# Altium PCB RcMPPT-SCC.PcbDoc
Units mm, origin at the board's own origin, x right, y up, seen from the top; angles counter-clockwise.
Board outline 99.06 x 71.12 mm, 4 copper layers (Top Layer, Int1 (GND), Int2 (PWR), Bottom Layer), stack 1.369 mm thick; 11 components, 8 nets, 127 pads, 75 vias.
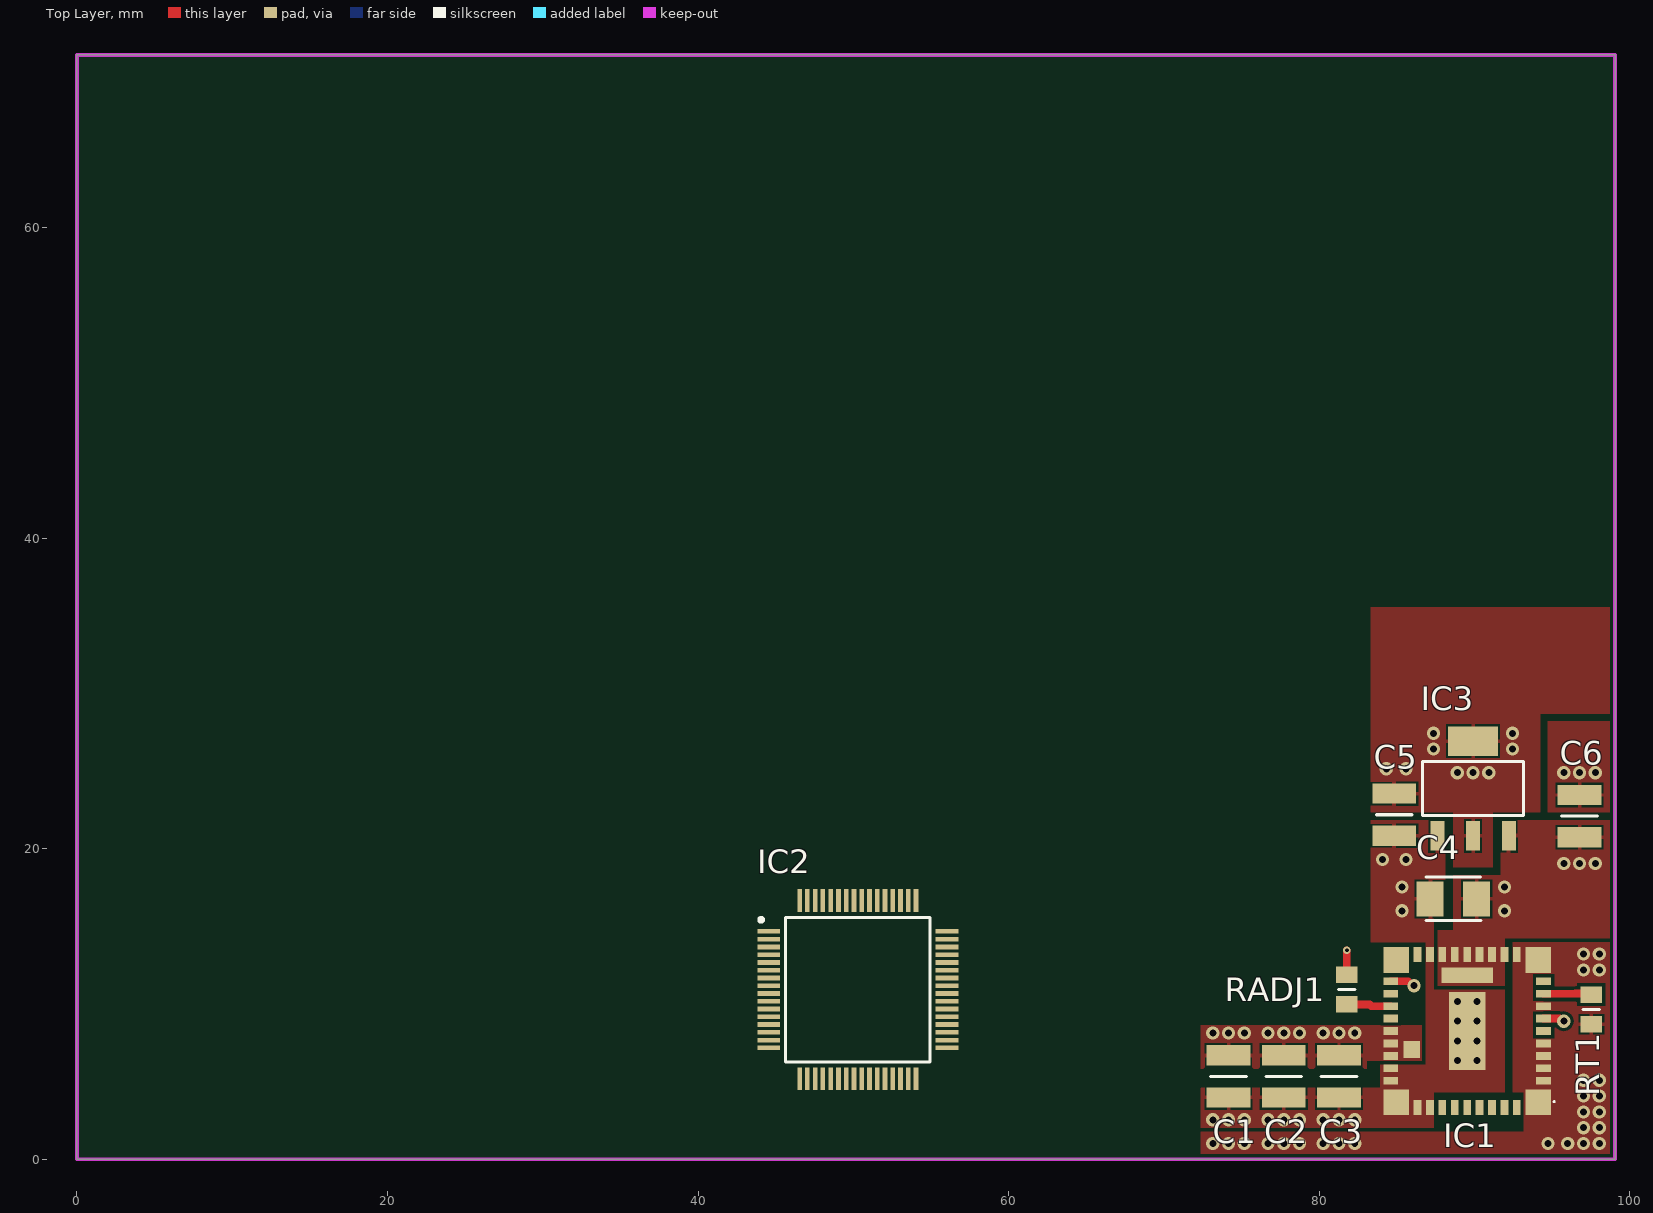
[diagram p0: Top Layer view]
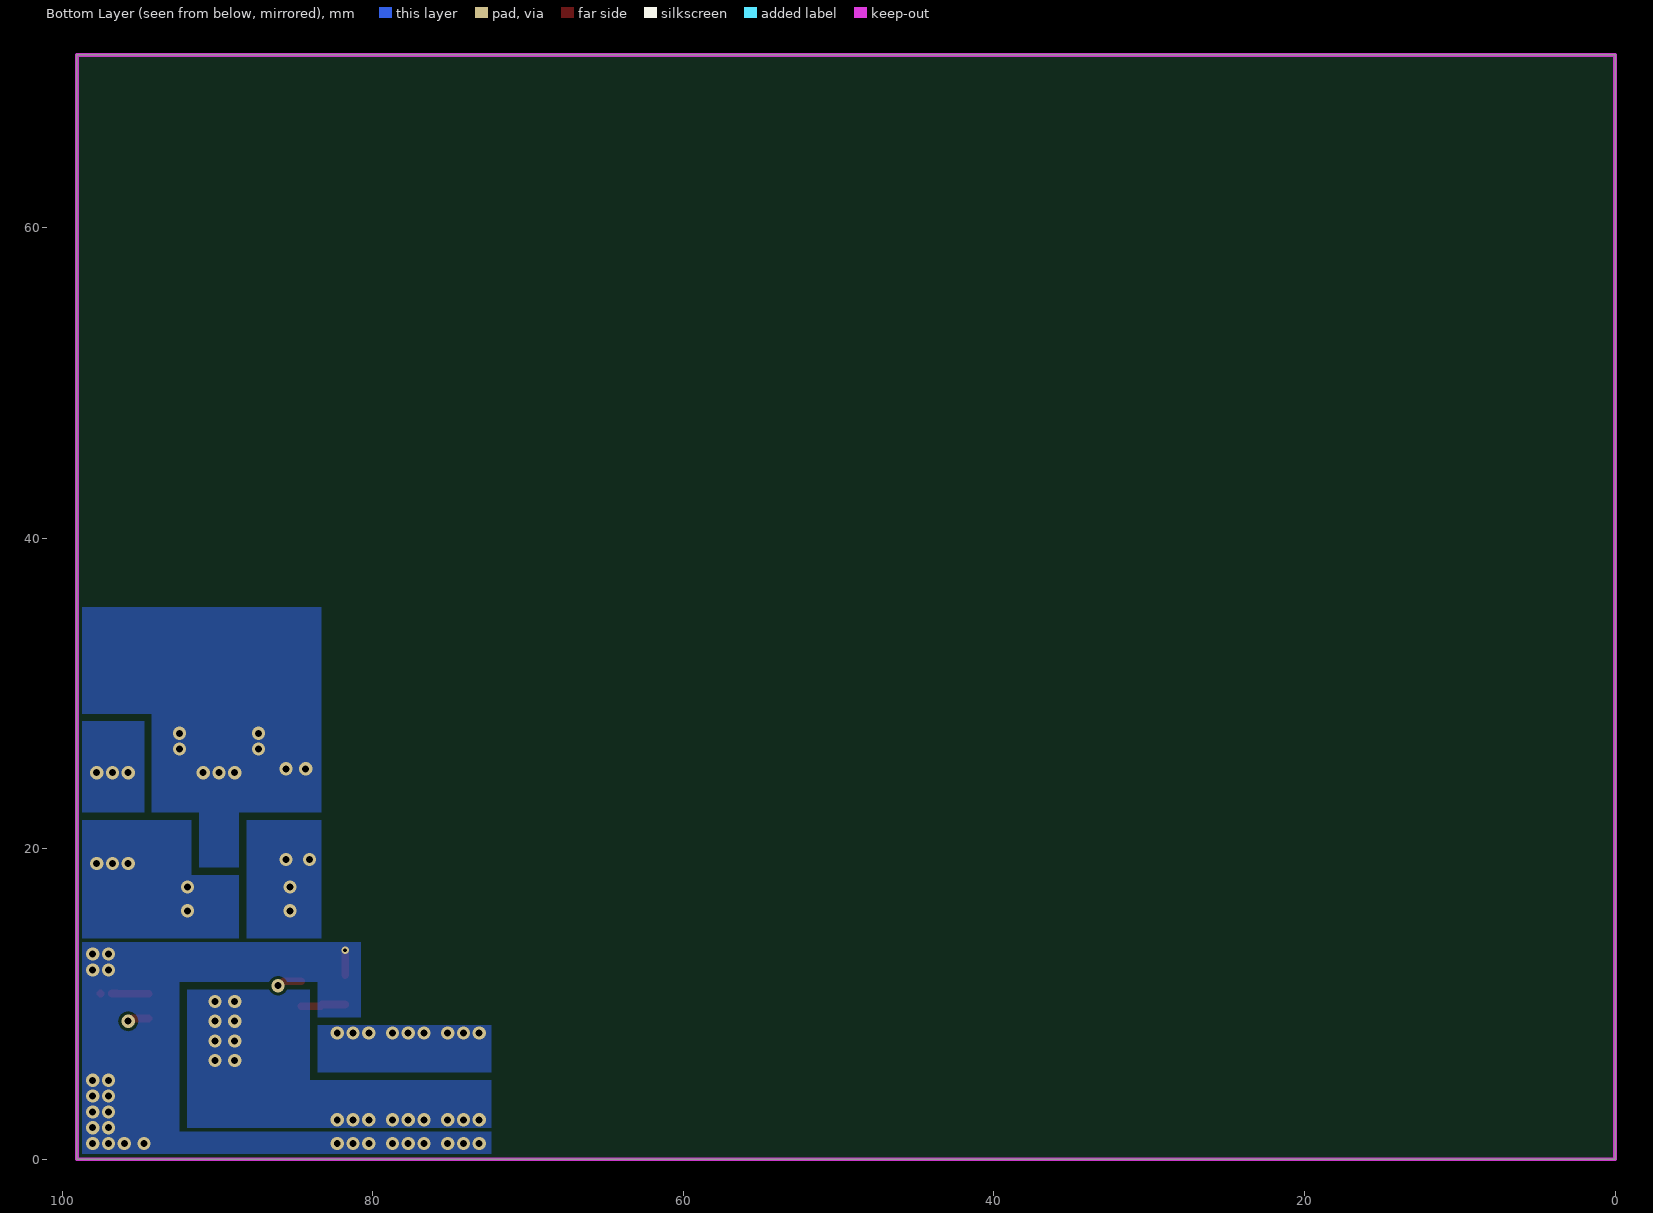
[diagram p1: Bottom Layer view, seen from below]
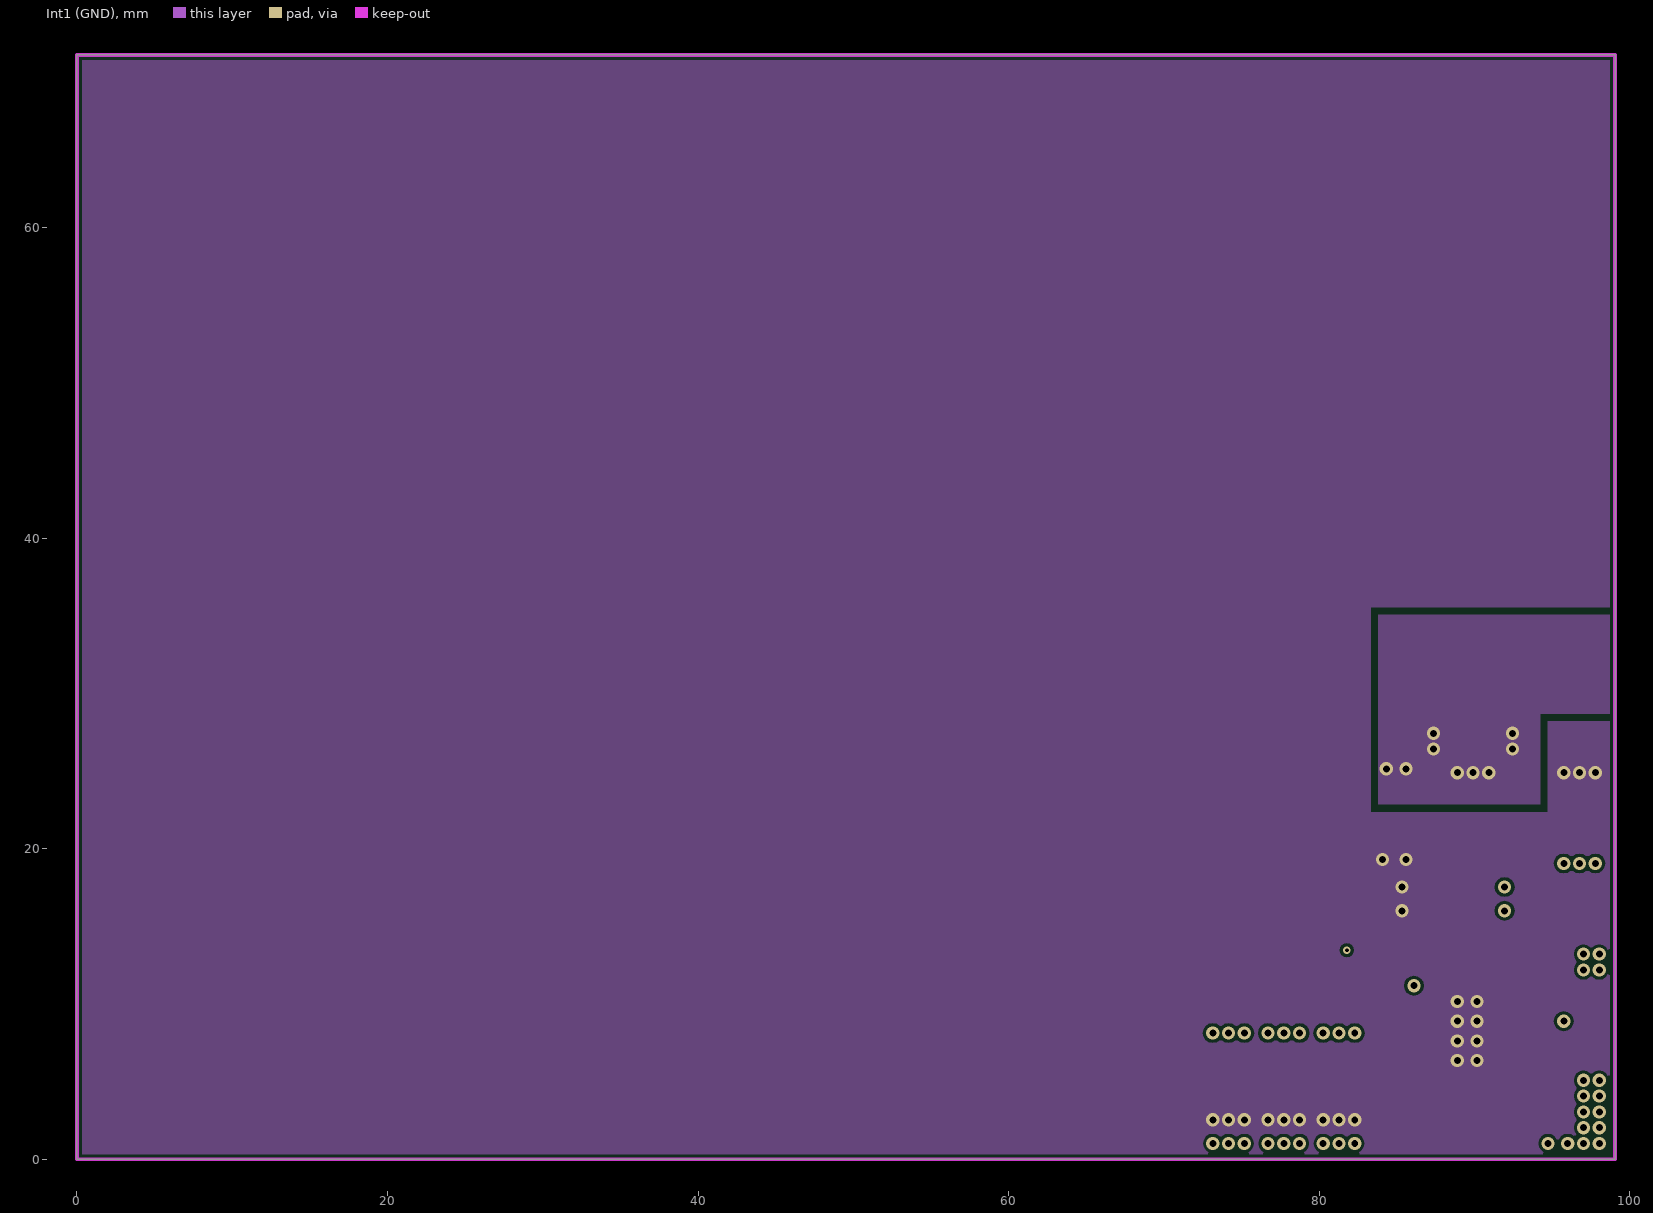
[diagram p2: Int1 (GND)]
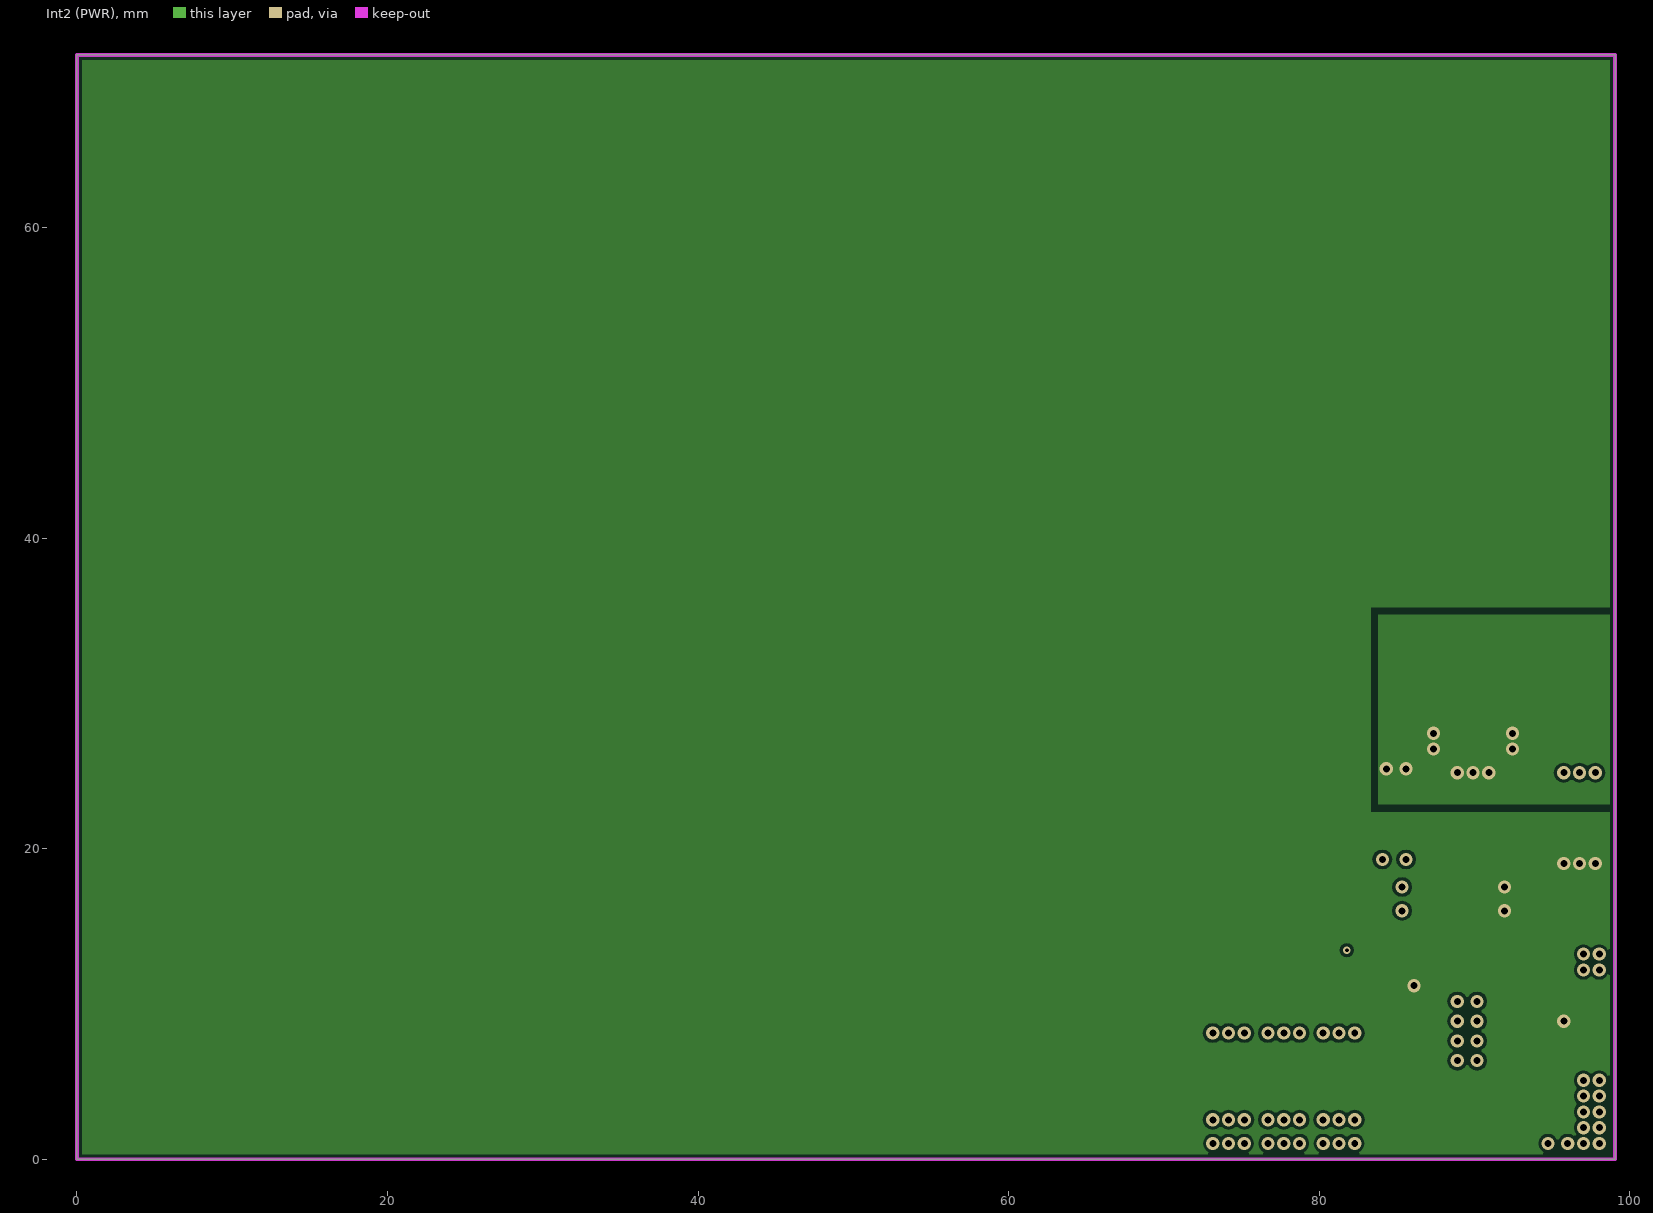
[diagram p3: Int2 (PWR)]
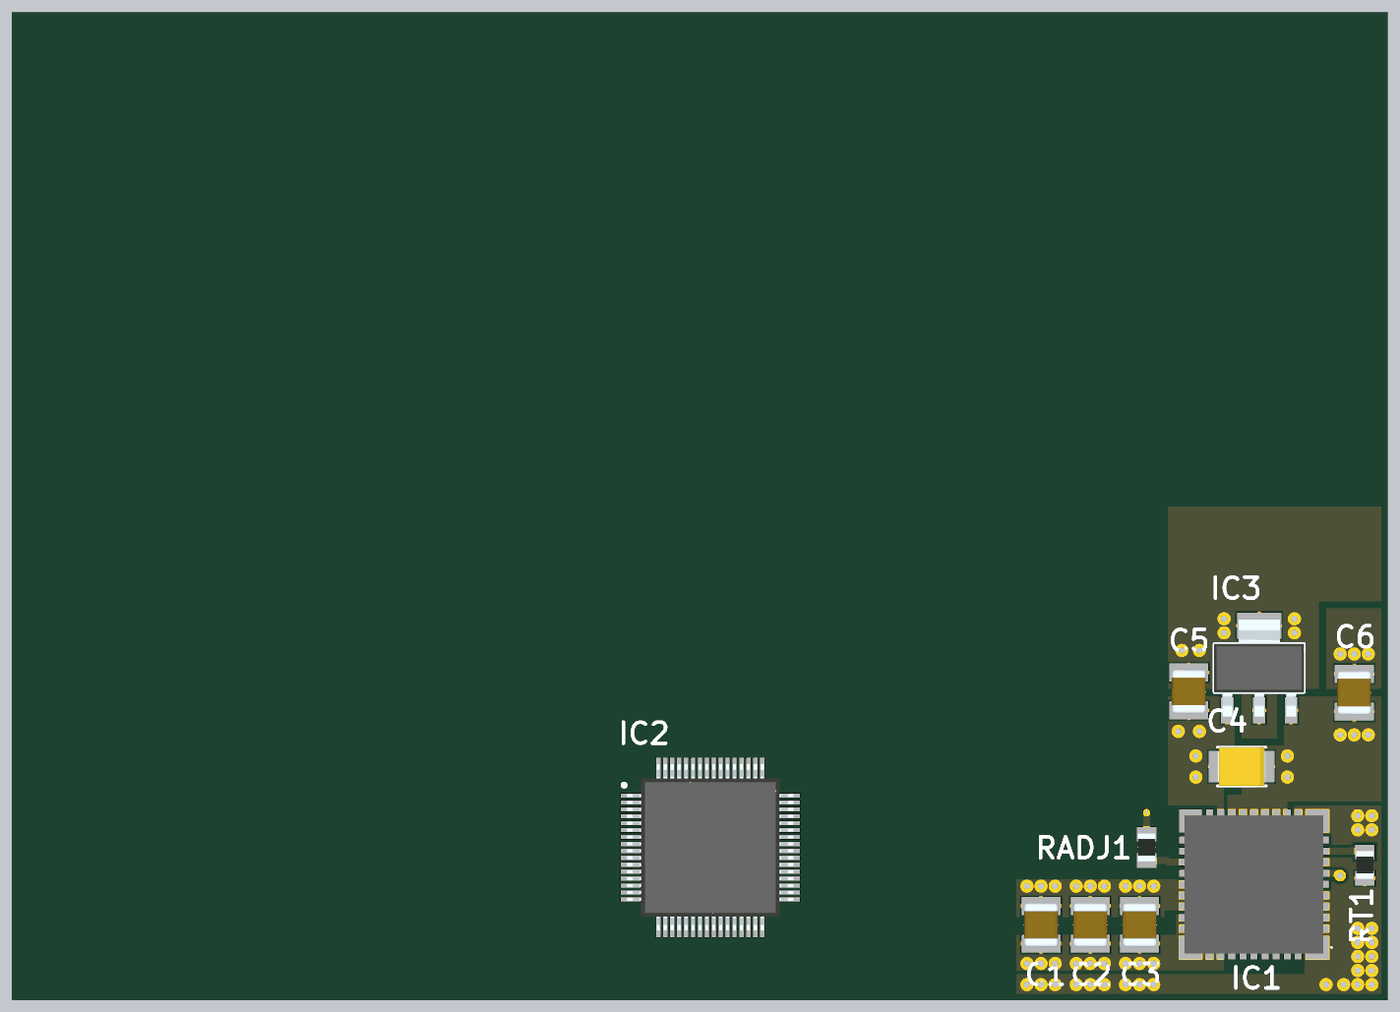
[diagram p4: 3D render of the assembled board from above, using the file's embedded part models]

## Layer stack, top to bottom
Top Solder: solder mask 0.0254, SM-001, Dk 4
Top Layer: signal copper 0.035
Dielectric 1: prepreg 0.1295, PP-017, Dk 4.3
Dielectric 2: prepreg 0.1295, PP-017, Dk 4.3
Int1 (GND): signal copper 0.035
Dielectric 3: core 0.7112, Core-039, Dk 4.8
Int2 (PWR): signal copper 0.035
Dielectric 4: prepreg 0.1295, PP-017, Dk 4.3
Dielectric 5: prepreg 0.1295, PP-017, Dk 4.3
Bottom Layer: signal copper 0.035
Bottom Solder: solder mask 0.0254, SM-001, Dk 4

## Board outline
0,0 99.06,0 99.06,71.12 0,71.12

## Design rules (kind name [scope] priority, off if disabled: settings)
BoardOutlineClearance [All] p1: gap=0.2 ignorepadtopadclearanceinfootprint=FALSE except(0.4: Arc-SplitBarrior Arc-SplitContinuation Track-SplitBarrior Track-SplitContinuation SMDPad-SplitBarrior SMDPad-SplitContinuation THPad-SplitBarrior THPad-SplitContinuation Via-SplitBarrior Via-SplitContinuation Fill-SplitBarrior Fill-SplitContinuation Poly-SplitBarrior Poly-SplitContinuation Region-SplitBarrior Region-SplitContinuation Text-SplitBarrior Text-SplitContinuation)
Clearance "Clearance Bottom Layer" [OnLayer('Bottom Layer')] p1: gap=0.203 ignorepadtopadclearanceinfootprint=TRUE except(0.254: Arc-Text Track-Text SMDPad-Text THPad-Text Via-Text Fill-Text Poly-Text Region-Text Text-Text)
Clearance "Clearance Top Layer" [OnLayer('Top Layer')] p2: gap=0.203 ignorepadtopadclearanceinfootprint=TRUE except(0.254: Arc-Text Track-Text SMDPad-Text THPad-Text Via-Text Fill-Text Poly-Text Region-Text Text-Text)
Clearance [All] p3: gap=0.2 ignorepadtopadclearanceinfootprint=FALSE except(0.089: Arc-Arc Arc-Track Arc-SMDPad Track-Track Track-SMDPad SMDPad-SMDPad; 0.127: Arc-Via Track-Via SMDPad-Via THPad-Via Via-Via; 0.254: Arc-Text Track-Text SMDPad-Text THPad-Text Via-Text Fill-Text Poly-Text Region-Text Text-Text)
HoleSize [All] p1: absolutevalues=TRUE maxlimit=6.3 minlimit=0.2 maxpercent=80.000 minpercent=20.000
MinimumAnnularRing [All] p1: minimumring=0.076
MinimumSolderMaskSliver [All] p1: minsoldermaskwidth=0.1
PlaneConnect [All] p1: pad.planeconnectstyle=Relief pad.reliefexpansion=0.508 pad.reliefentries=4 pad.reliefconductorwidth=0.254 pad.reliefairgap=0.15 via.planeconnectstyle=Direct via.reliefexpansion=0.508 via.reliefentries=4 via.reliefconductorwidth=0.254 via.reliefairgap=0.254
PolygonConnect PolygonConnect_1 [All] p1: thpad.connectstyle=Relief thpad.reliefconductorwidth=0.254 thpad.reliefentries=4 thpad.polygonreliefangle="90 Angle" thpad.airgapwidth=0.254 smdpad.connectstyle=Relief smdpad.reliefconductorwidth=0.254 smdpad.reliefentries=4 smdpad.polygonreliefangle="90 Angle" smdpad.airgapwidth=0.125 via.connectstyle=Direct via.reliefconductorwidth=0.508 via.reliefentries=4 via.polygonreliefangle="90 Angle" via.airgapwidth=0.254
RoutingCorners [All] p1: cornerstyle=Round minsetback=2.54 maxsetback=2.54
RoutingVias [All] p1: holewidth=0.5 width=1 viastyle="Through Hole" minholewidth=0.2 minwidth=0.45 maxholewidth=1 maxwidth=2
SilkToSilkClearance [All] p1: silktosilkclearance=0.1
SilkToSolderMaskClearance [IsPad] p1: minsilkscreentomaskgap=0.1 clearancetoexposedcopper=TRUE
SolderMaskExpansion [All] p1: expansion=0.05 istentingtop=FALSE
Width [All] p1: maxlimit=2.54 minlimit=0.089 preferedwidth=0.381
24 further rules are at their usual default settings.

## Classes and differential pairs
component class RcMPPT-MCU: IC2
component class RcMPPT-Power_Module: C1 C2 C3 C4 C5 C6 IC1 IC3 RADJ1 RT1

## Components (designator, comment, footprint, x,y, rotation, side; value= is the part's Value field where it differs from the comment)
C1 "10uF" CAPC3225X280N 74.168,5.334 r270 top
C2 "10uF" CAPC3225X280N 77.724,5.334 r270 top
C3 "10uF" CAPC3225X280N 81.28,5.334 r270 top
C4 "100uF" CAPPM3528X200N 88.646,16.764 r180 top
C5 "10uF" CAPC3225X280N 84.836,22.188 r270 top
C6 "10uF" CAPC3225X280N 96.774,22.098 r90 top
IC1 "LMZ36002RVQT" LMZ36002RVQR 89.535,8.255 r90 top
IC2 "STM32F334R8" QFP50P1200X1200X160-64N 50.292,10.922 r0 top
IC3 "AP2114H-3.3TRG1" SOT230P700X180-4N 89.916,23.876 r90 top
RADJ1 "5.05k" R0805 81.788,10.922 r90 top
RT1 "49.9k" R0805 97.536,9.652 r270 top

## Footprints (in the part's own frame and the unit in brackets; to place one, negate y for a bottom-side part, rotate by r counter-clockwise, add the part's x,y. Pads: shape width x height; smd on the part's side, far side on the other; paste and mask are expansions set on the pad)
CAPC3225X280N [mm]
  rect 1.3x2.82 smd: 1(-1.36,0) 2(1.36,0)
  silkscreen extent 0,-1.15 0,1.15, body extent -1.6,-1.25 1.6,1.25, height 2.8
CAPPM3528X200N [mm]
  rect 1.75x2.25 smd: 1(-1.5,0) 2(1.5,0)
  silkscreen extent -1.78,-1.4 1.75,1.4, body extent -1.75,-1.4 1.75,1.4, height 2
LMZ36002RVQR [mm]
  rect 1.65x1.65 smd: 1(-4.575,-4.575) 11(4.575,-4.575) 21(4.575,4.575) 31(-4.575,4.575)
  rect 0.5x0.95 smd: 2(-3.2,-4.925) 3(-2.4,-4.925) 4(-1.6,-4.925) 5(-0.8,-4.925) 6(0,-4.925) 7(0.8,-4.925) 8(1.6,-4.925) 9(2.4,-4.925) 10(3.2,-4.925) 22(3.2,4.925) 23(2.4,4.925) 24(1.6,4.925) 25(0.8,4.925) 26(0,4.925) 27(-0.8,4.925) 28(-1.6,4.925) 29(-2.4,4.925) 30(-3.2,4.925)
  rect 0.95x0.5 smd: 12(4.925,-3.2) 13(4.925,-2.4) 14(4.925,-1.6) 15(4.925,-0.8) 16(4.925,0) 17(4.925,0.8) 18(4.925,1.6) 19(4.925,2.4) 20(4.925,3.2) 32(-4.925,3.2) 33(-4.925,2.4) 34(-4.925,1.6) 35(-4.925,0.8) 36(-4.925,0) 37(-4.925,-0.8) 38(-4.925,-1.6) 39(-4.925,-2.4) 40(-4.925,-3.2)
  rect 5x2.35 smd: 41(0,0)
  rect 1.12x1.05 smd: 42(-1.187,3.575)
  rect 1x3.3 smd: 43(3.6,0)
  silkscreen extent -4.6,-5.65 -4.5,-5.55, body extent -5,-5 5,5, height 2.23
QFP50P1200X1200X160-64N [mm]
  rect 1.475x0.3 smd: 1(-5.738,3.75) 2(-5.738,3.25) 3(-5.738,2.75) 4(-5.738,2.25) 5(-5.738,1.75) 6(-5.738,1.25) 7(-5.738,0.75) 8(-5.738,0.25) 9(-5.738,-0.25) 10(-5.738,-0.75) 11(-5.738,-1.25) 12(-5.738,-1.75) 13(-5.738,-2.25) 14(-5.738,-2.75) 15(-5.738,-3.25) 16(-5.738,-3.75) 33(5.738,-3.75) 34(5.738,-3.25) 35(5.738,-2.75) 36(5.738,-2.25) 37(5.738,-1.75) 38(5.738,-1.25) 39(5.738,-0.75) 40(5.738,-0.25) 41(5.738,0.25) 42(5.738,0.75) 43(5.738,1.25) 44(5.738,1.75) 45(5.738,2.25) 46(5.738,2.75) 47(5.738,3.25) 48(5.738,3.75)
  rect 0.3x1.475 smd: 17(-3.75,-5.738) 18(-3.25,-5.738) 19(-2.75,-5.738) 20(-2.25,-5.738) 21(-1.75,-5.738) 22(-1.25,-5.738) 23(-0.75,-5.738) 24(-0.25,-5.738) 25(0.25,-5.738) 26(0.75,-5.738) 27(1.25,-5.738) 28(1.75,-5.738) 29(2.25,-5.738) 30(2.75,-5.738) 31(3.25,-5.738) 32(3.75,-5.738) 49(3.75,5.738) 50(3.25,5.738) 51(2.75,5.738) 52(2.25,5.738) 53(1.75,5.738) 54(1.25,5.738) 55(0.75,5.738) 56(0.25,5.738) 57(-0.25,5.738) 58(-0.75,5.738) 59(-1.25,5.738) 60(-1.75,5.738) 61(-2.25,5.738) 62(-2.75,5.738) 63(-3.25,5.738) 64(-3.75,5.738)
  silkscreen extent -6.35,-4.65 4.65,4.65, body extent -6,-6 6,6, height 1.6
R0805 [mm]
  rect 1.05x1.4 smd: 1(-0.95,0) 2(0.95,0)
  silkscreen extent 0,-0.53 0,0.53, body extent -1,-0.63 1,0.63, height 0.7
SOT230P700X180-4N [mm]
  rect 1.9x0.9 smd: 1(-3.05,2.3) 2(-3.05,0) 3(-3.05,-2.3)
  rect 1.9x3.2 smd: 4(3.05,0)
  silkscreen extent -1.75,-3.25 1.75,3.25, body extent -3.5,-3.25 3.5,3.25, height 1.8

## Part data
C1 C2 C3 C5 C6: library part CL32B106KMVNNWE, "Capacitor", Manufacturer_Name="Samsung Electro-Mechanics", Mouser Part Number=N/A, Arrow Part Number=CL32B106KMVNNWE, Arrow Price/Stock=https://www.arrow.com/en/products/cl32b106kmvnnwe/samsung-electro-mechanics, Datasheet Link=https://www.arrow.com/en/products/cl32b106kmvnnwe/samsung-electro-mechanics, Height=2.8mm, Manufacturer_Part_Number=CL32B106KMVNNWE, Mouser Price/Stock=https://www.mouser.co.uk/ProductDetail/Samsung-Electro-Mechanics/CL32B106KMVNNWE?qs=xZ%2FP%252Ba9zWqaEMBbSgKy8gQ%3D%3D
C4: library part 8TPE100MAZB, "Capacitor Polarised", Manufacturer_Name=Panasonic, Mouser Part Number=667-8TPE100MAZB, Arrow Part Number=8TPE100MAZB, Arrow Price/Stock=https://www.arrow.com/en/products/8tpe100mazb/panasonic, Datasheet Link=http://uk.rs-online.com/web/p/products/7887374, Height=2mm, Manufacturer_Part_Number=8TPE100MAZB, Mouser Price/Stock=https://www.mouser.co.uk/ProductDetail/Panasonic/8TPE100MAZB?qs=OE1iw1LrrPHKTwwfsidxgA%3D%3D
IC1: "Integrated Circuit", Manufacturer_Name="Texas Instruments", Mouser Part Number=595-LMZ36002RVQT, Arrow Part Number=LMZ36002RVQT, Arrow Price/Stock=https://www.arrow.com/en/products/lmz36002rvqt/texas-instruments, Datasheet Link=http://www.ti.com/lit/gpn/lmz36002, Height=2.13mm, Manufacturer_Part_Number=LMZ36002RVQT, Mouser Price/Stock=https://www.mouser.co.uk/ProductDetail/Texas-Instruments/LMZ36002RVQT?qs=kFLL9AfgRSBjXTxBMSjGOw%3D%3D
IC2: library part STM32F334R8T6, "Integrated Circuit", Manufacturer_Name=STMicroelectronics, Mouser Part Number=511-STM32F334R8T6, Arrow Part Number=STM32F334R8T6, Arrow Price/Stock=https://www.arrow.com/en/products/stm32f334r8t6/stmicroelectronics, Datasheet Link=http://www.st.com/content/ccc/resource/technical/document/datasheet/d1/cd/3d/18/a2/2c/4e/d0/DM00097745.pdf/files/DM00097745.pdf/jcr:content/translations/en.DM00097745.pdf, Height=1.6mm, Manufacturer_Part_Number=STM32F334R8T6, Mouser Price/Stock=https://www.mouser.co.uk/ProductDetail/STMicroelectronics/STM32F334R8T6?qs=9MuLHSklicolCfS00G2jAg%3D%3D
IC3: "Integrated Circuit", Manufacturer_Name="Diodes Inc.", Mouser Part Number=621-AP2114H-3.3TRG1, Arrow Part Number=AP2114H-3.3TRG1, Arrow Price/Stock=https://www.arrow.com/en/products/ap2114h-3.3trg1/diodes-incorporated, Datasheet Link=http://uk.rs-online.com/web/p/products/8283528, Height=1.8mm, Manufacturer_Part_Number=AP2114H-3.3TRG1, Mouser Price/Stock=https://www.mouser.co.uk/ProductDetail/Diodes-Incorporated/AP2114H-33TRG1?qs=x6A8l6qLYDDSG%2FfwzcsOhw%3D%3D
RADJ1: library part RT0805BRD075K05L, "Resistor", Manufacturer_Name=Yageo, Mouser Part Number=603-RT0805BRD075K05L, Datasheet Link=https://www.mouser.at/datasheet/2/447/PYu-RT_1-to-0.01_RoHS_L_11-1669912.pdf, Height=0.7mm, Manufacturer_Part_Number=RT0805BRD075K05L, Mouser Price/Stock=https://www.mouser.at/ProductDetail/Yageo/RT0805BRD075K05L?qs=bQfrgN9vNvwObDVrZ%2FDM5w%3D%3D
RT1: library part ERJ-6ENF4992V, "Resistor", Manufacturer_Name=Panasonic, Mouser Part Number=667-ERJ-6ENF4992V, Datasheet Link=https://industrial.panasonic.com/cdbs/www-data/pdf/RDA0000/AOA0000C84.pdf, Height=0.7mm, Manufacturer_Part_Number=ERJ-6ENF4992V, Mouser Price/Stock=https://www.mouser.com/Search/Refine.aspx?Keyword=667-ERJ-6ENF4992V

## Via types
v1: diameter 0.85, hole 0.45, Top Layer to Bottom Layer, 74 vias
v2: diameter 0.5, hole 0.25, Top Layer to Bottom Layer, 1 vias

## Nets (pads, with @x,y where several pads share a name; then routed paths per layer and width w, separated by ;. In a path a pad name is that pad's centre, name@x,y a point inside that pad or via, vN(x,y) a via of type N, cw(c..) or ccw(c..) an arc to the next point about the centre after c; other vN are vias at no path point)
3V3: C5.1 IC3.2 IC3.4
  other v1: 88.9,24.892 89.916,24.892 90.932,24.892 84.328,25.146 85.598,25.146 87.376,26.416 92.456,26.416 87.376,27.432 92.456,27.432
+5: C4.1 C6.1 IC1.7 IC1.13 IC1.14 IC1.15 IC1.16 IC1.17 IC1.18 IC1.22 IC1.43 IC3.3 | length 3
  Top Layer w0.5: IC1.22 85.732,11.455 86.011,11.176 v1(86.106,11.176) ; IC1.7 95.498,9.055 95.663,8.89 v1(95.758,8.89)
  other v1: 91.948,16.002 91.948,17.526 95.758,19.05 96.774,19.05 97.79,19.05
AGND: IC1.1 IC1.2 IC1.3 IC1.4 IC1.5 IC1.8 IC1.11 IC1.12 RADJ1.2 RT1.2 | length 1.6
  Top Layer w0.5: RADJ1.2 v2(81.788,13.462)
  other v1: 73.152,1.016 74.168,1.016 75.184,1.016 76.708,1.016 77.724,1.016 78.74,1.016 80.264,1.016 81.28,1.016 82.296,1.016 94.742,1.016 96.012,1.016 97.028,1.016 98.044,1.016 97.028,2.032 98.044,2.032 97.028,3.048 98.044,3.048 97.028,4.064 98.044,4.064 97.028,5.08 98.044,5.08 97.028,12.192 98.044,12.192 97.028,13.208 98.044,13.208
PGND: C1.2 C2.2 C3.2 C4.2 C5.2 C6.2 IC1.19 IC1.29 IC1.30 IC1.31 IC1.32 IC1.33 IC1.41 IC3.1
  other v1: 73.152,2.54 74.168,2.54 75.184,2.54 76.708,2.54 77.724,2.54 78.74,2.54 80.264,2.54 81.28,2.54 82.296,2.54 88.9,6.35 90.17,6.35 88.9,7.62 90.17,7.62 88.9,8.89 90.17,8.89 88.9,10.16 90.17,10.16 85.344,16.002 85.344,17.526 84.074,19.304 85.598,19.304 95.758,24.892 96.774,24.892 97.79,24.892
RT: IC1.9 RT1.1 | length 2.4
  Top Layer w0.508: IC1.9 96.507,10.655 96.52,10.668 96.816,10.668 ; RT1.1@97.527,10.659 RT1.1@97.536,10.668
RTSEL: IC1.10
VADJ: IC1.24 RADJ1.1 | length 2.9
  Top Layer w0.5: RADJ1.1 83.255,9.972 83.372,9.855 IC1.24
VCC: C1.1 C2.1 C3.1 IC1.26 IC1.27 IC1.28 IC1.42
  other v1: 73.152,8.128 74.168,8.128 75.184,8.128 76.708,8.128 77.724,8.128 78.74,8.128 80.264,8.128 81.28,8.128 82.296,8.128
pads on no net: IC1.6 IC1.20 IC1.21 IC1.23 IC1.25 IC1.34 IC1.35 IC1.36 IC1.37 IC1.38 IC1.39 IC1.40 IC2.1 IC2.2 IC2.3 IC2.4 IC2.5 IC2.6 IC2.7 IC2.8 IC2.9 IC2.10 IC2.11 IC2.12 IC2.13 IC2.14 IC2.15 IC2.16 IC2.17 IC2.18 IC2.19 IC2.20 IC2.21 IC2.22 IC2.23 IC2.24 IC2.25 IC2.26 IC2.27 IC2.28 IC2.29 IC2.30 IC2.31 IC2.32 IC2.33 IC2.34 IC2.35 IC2.36 IC2.37 IC2.38 IC2.39 IC2.40 IC2.41 IC2.42 IC2.43 IC2.44 IC2.45 IC2.46 IC2.47 IC2.48 IC2.49 IC2.50 IC2.51 IC2.52 IC2.53 IC2.54 IC2.55 IC2.56 IC2.57 IC2.58 IC2.59 IC2.60 IC2.61 IC2.62 IC2.63 IC2.64

## Polygon pours and split planes (outlines as drawn)
PGND on Top Layer "PGND_L01_P024" (solid, pour order 24): 94.742,28.194 94.742,22.352 99.06,22.352 99.06,28.194
3V3 on Top Layer "3V3_L01_P021" (solid, pour order 21): 99.06,35.56 99.06,28.702 94.234,28.702 94.234,22.352 91.186,22.352 91.186,18.796 88.646,18.796 88.646,22.352 83.312,22.352 83.312,35.56
+5 on Top Layer "+5_L01_P005" (solid, pour order 5): 91.694,18.288 91.694,21.844 99.06,21.844 99.06,14.224 91.948,14.224 91.948,11.176 87.63,11.176 87.63,14.732 88.646,14.732 88.646,18.288
PGND on Top Layer "PGND_L01_P003" (solid, pour order 3): 86.868,13.97 83.312,13.97 83.312,21.844 88.138,21.844 88.138,15.494 87.376,15.494 87.376,10.922 91.948,10.922 91.948,4.318 87.376,4.318 87.376,2.032 72.39,2.032 72.39,4.572 72.42,4.602 83.932,4.602 83.932,6.096 86.868,6.096
AGND on Top Layer "AGND_L01_P002" (solid, pour order 2): 72.39,0 72.39,1.778 72.397,1.785 93.18,1.785 93.18,4.28 93.218,4.318 92.456,4.318 92.456,13.97 99.06,13.97 99.06,0
VCC on Top Layer "VCC_L01_P001" (solid, remove dead copper, pour order 1): 86.614,6.35 83.058,6.35 83.058,5.842 72.39,5.842 72.39,8.636 80.518,8.636 86.614,8.636
3V3 on Int2 (PWR) "3V3_L03_P025" (solid, pour order 25): 99.06,35.052 83.82,35.052 83.82,22.86 99.06,22.86
+5 on Int2 (PWR) "+5_L03_P006" (solid, pour order 6): 99.06,35.56 83.312,35.56 83.312,22.352 99.06,22.352 99.06,0 0,0 0,71.12 99.06,71.12
PGND on Bottom Layer "PGND_L04_P023" (solid, pour order 23): 94.742,28.194 94.742,22.352 99.06,22.352 99.06,28.194
3V3 on Bottom Layer "3V3_L04_P022" (solid, pour order 22): 99.06,35.56 99.06,28.702 94.234,28.702 94.234,22.352 91.186,22.352 91.186,18.796 88.646,18.796 88.646,22.352 83.312,22.352 83.312,35.56
PGND on Bottom Layer "PGND_L04_P018" (solid, pour order 18): 83.312,21.844 88.138,21.844 88.138,14.224 83.312,14.224
AGND on Bottom Layer "AGND_L04_P016" (solid, pour order 16): 80.772,13.97 80.772,9.144 83.566,9.144 83.566,11.43 92.456,11.43 92.456,1.778 72.39,1.778 72.39,0 99.06,0 99.06,13.97
+5 on Bottom Layer "+5_L04_P015" (solid, pour order 15): 91.694,18.288 91.694,21.844 99.06,21.844 99.06,14.224 88.646,14.224 88.646,18.288
no net on Bottom Layer "NONET_L04_P014" (solid, pour order 14): 88.392,11.176
PGND on Bottom Layer "PGND_L04_P013" (solid, pour order 13): 88.138,10.922 84.074,10.922 84.074,5.08 72.39,5.08 72.39,2.032 91.948,2.032 91.948,10.922
VCC on Bottom Layer "VCC_L04_P012" (solid, pour order 12): 72.39,8.636 83.566,8.636 83.566,5.588 72.39,5.588
3V3 on Int1 (GND) "3V3_L02_P026" (solid, pour order 26): 99.06,28.702 94.234,28.702 94.234,22.86 83.82,22.86 83.82,35.052 99.06,35.052
PGND on Int1 (GND) "PGND_L02_P000" (solid, remove dead copper, pour order 0): 94.742,22.352 94.742,28.194 99.06,28.194 99.06,0 0,0 0,71.12 99.06,71.12 99.06,35.56 83.312,35.56 83.312,22.352

## Keep-outs
Keep-Out Layer:
  the board outline again, w0.254

## Silkscreen, mask and mechanical layers (free items; w line width, h text height)
Board:
  the board outline again, w0.254